# Altium PCB PCB1.PcbDoc
Units mm, origin at the board's own origin, x right, y up, seen from the top; angles counter-clockwise.
Board outline 60.95 x 78.23 mm, 2 copper layers (Top Layer, Bottom Layer); 11 components, 9 nets, 61 pads, 0 vias.
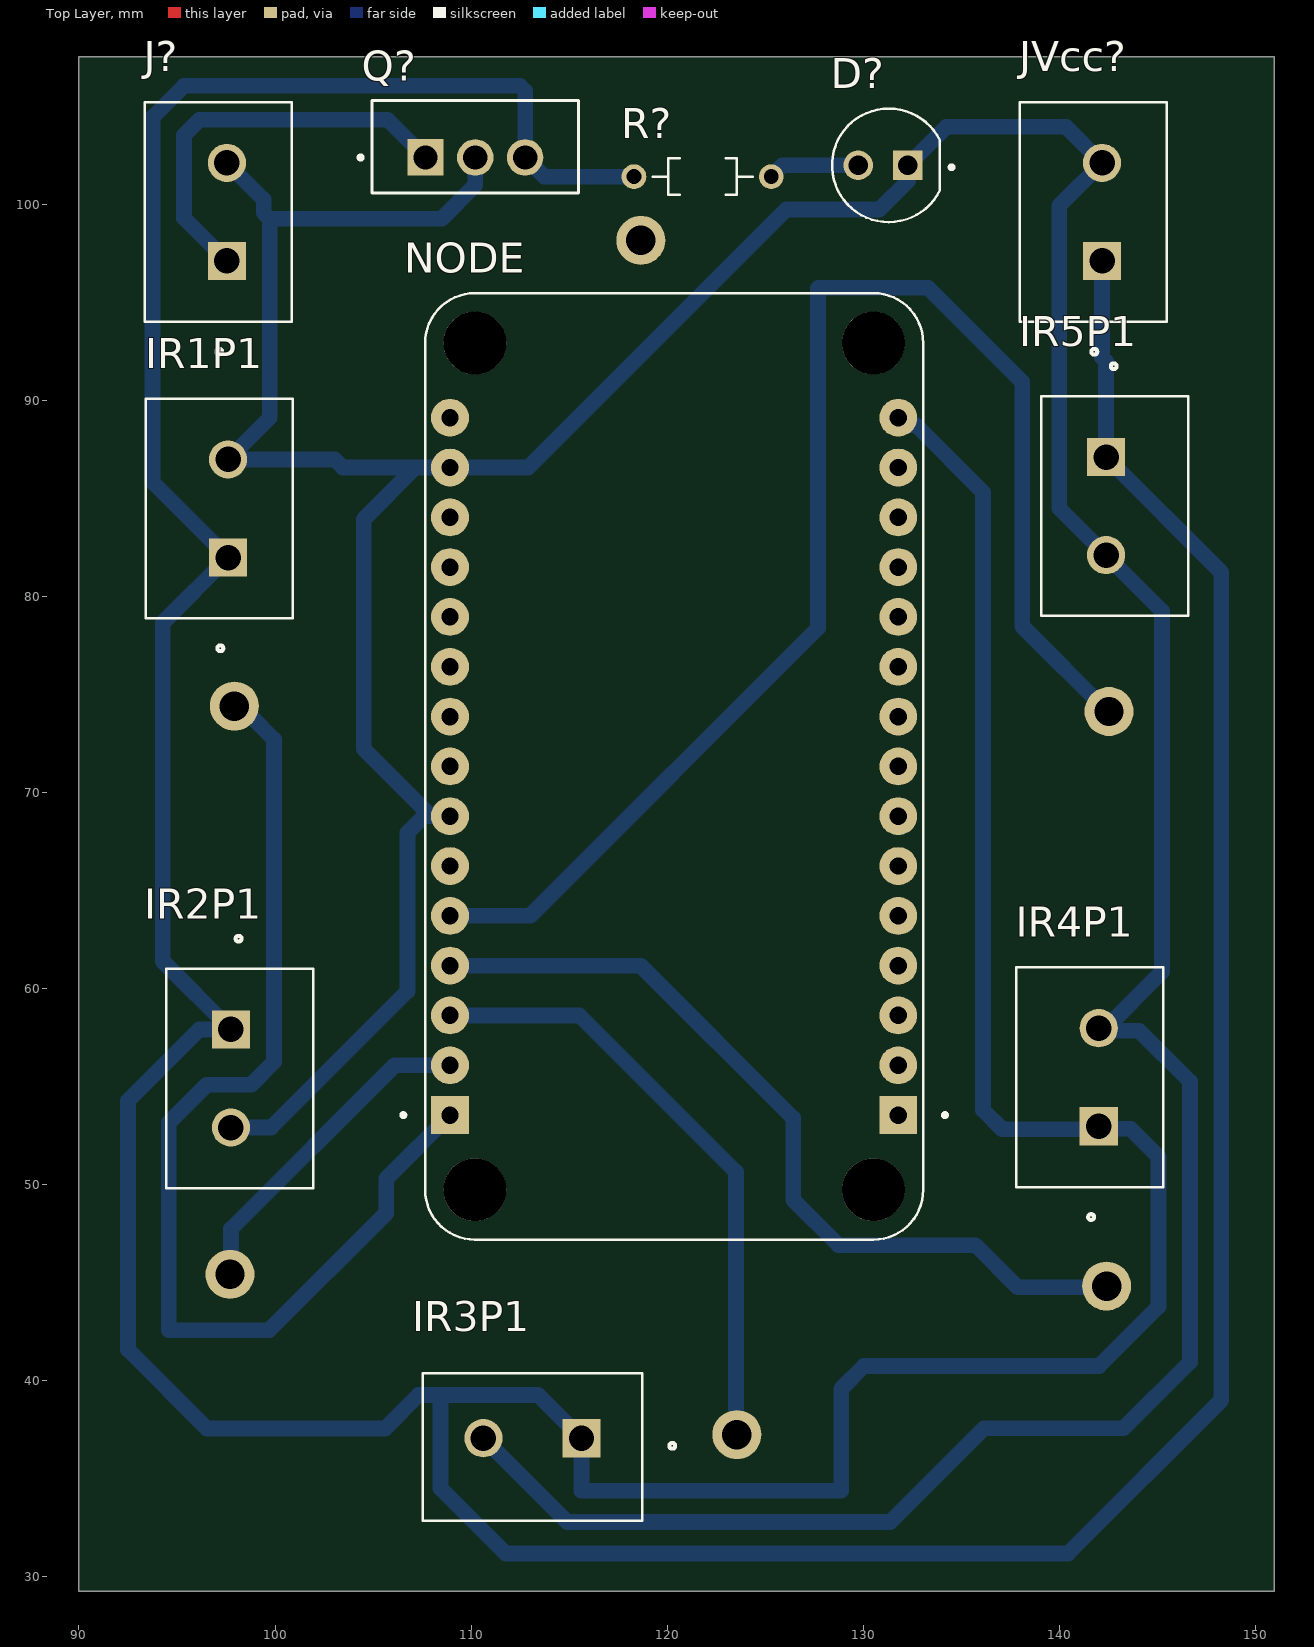
[diagram p0: Top Layer view]
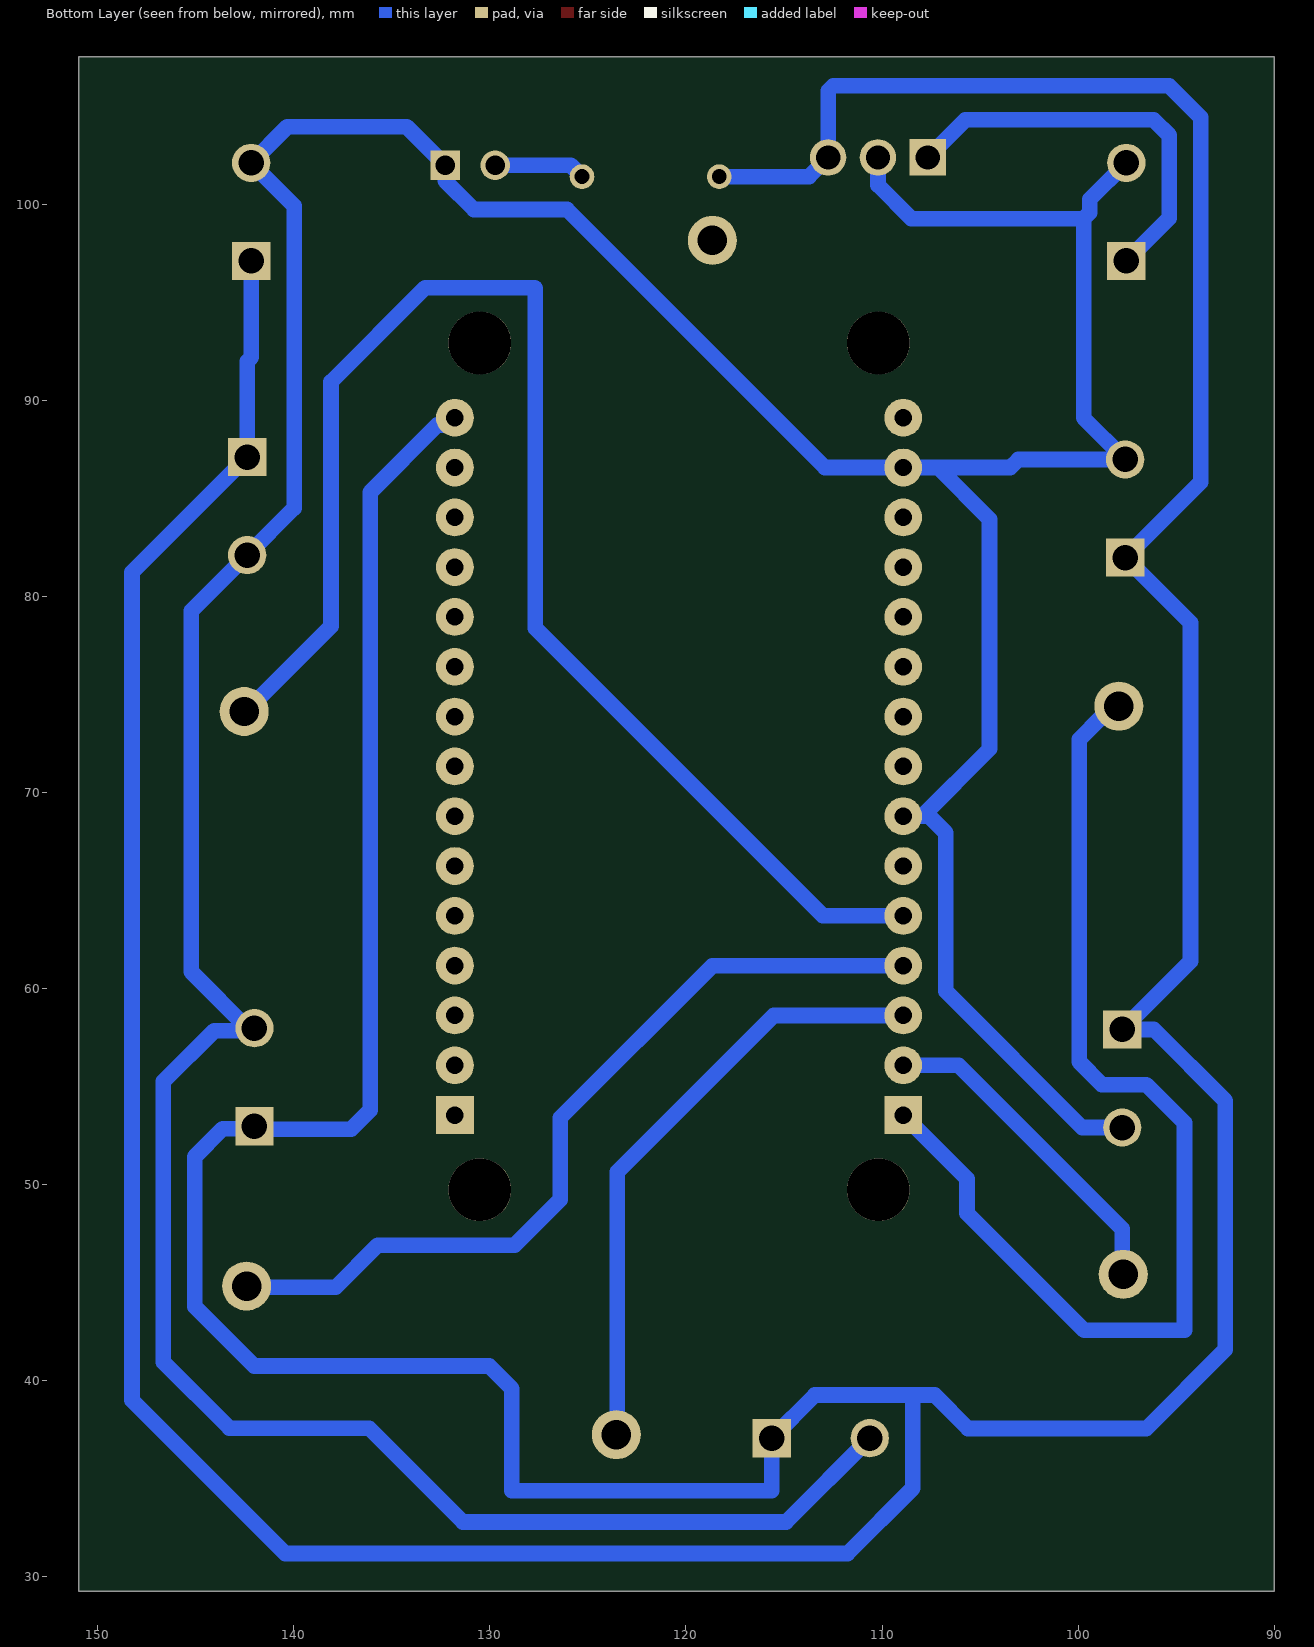
[diagram p1: Bottom Layer view, seen from below]
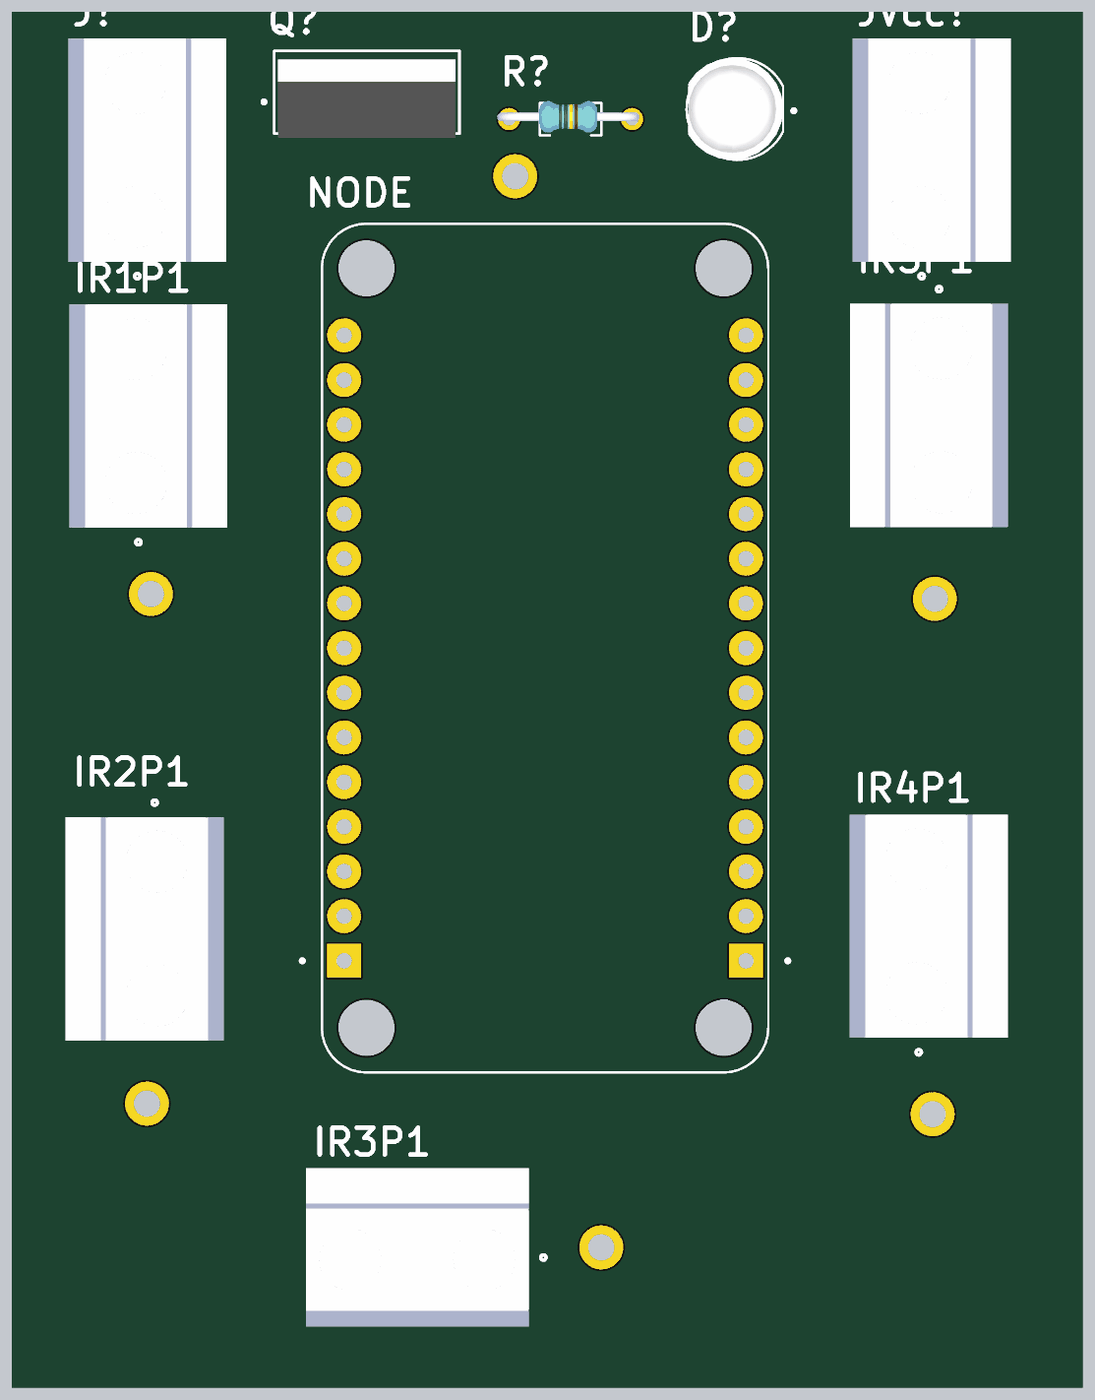
[diagram p2: 3D render of the assembled board from above, using the file's embedded part models]

## Layer stack, top to bottom
Top Solder: solder mask 0.0102, Solder Resist, Dk 3.5
Top Layer: signal copper 0.0356
Dielectric 1: dielectric 0.32, FR-4, Dk 4.8
Bottom Layer: signal copper 0.0356
Bottom Solder: solder mask 0.0102, Solder Resist, Dk 3.5

## Board outline
90,29.275 150.95,29.275 150.95,107.5 90,107.5

## Design rules (kind name [scope] priority, off if disabled: settings)
Clearance [All] p1: gap=0.8 ignorepadtopadclearanceinfootprint=FALSE
PolygonConnect [All] p1: connectstyle=Relief reliefconductorwidth=0.254 reliefentries=4 polygonreliefangle="90 Angle" airgapwidth=0.254
RoutingLayers [All] p1: top layer_v5=FALSE bottom layer_v5=TRUE
RoutingVias [All] p1: holewidth=0.711 width=1.27 viastyle="Through Hole" minholewidth=0.711 minwidth=1.27 maxholewidth=0.711 maxwidth=1.27
SolderMaskExpansion [All] p1: expansion=0.102
Width [All] p1: maxlimit=0.8 minlimit=0.8 preferedwidth=0.8
29 further rules are at their usual default settings.

## Classes and differential pairs
component class Sheet1: D? IR1P1 IR2P1 IR3P1 IR5P1 J? JVcc? NODE Q? R?

## Components (designator, comment, footprint, x,y, rotation, side; value= is the part's Value field where it differs from the comment)
D? "151054RS03000" LED_151054RS03000 131,101.975 r180 top
IR1P1 "" OST_OSTTC020162 97.6,81.975 r90 top
IR2P1 "" OST_OSTTC020162 97.75,57.91 r270 top
IR3P1 "" OST_OSTTC020162 115.625,37.068 r180 top
IR4P1 "" OST_OSTTC020162 142,52.975 r90 top
IR5P1 "" OST_OSTTC020162 142.375,87.1 r270 top
J? "OSTTC020162" OST_OSTTC020162 97.543,97.1 r90 top
JVcc? "OSTTC020162" OST_OSTTC020162 142.168,97.1 r90 top
NODE "113990105" SEEED_113990105 120.35,71.325 r180 top
Q? "LM7805CT/NOPB" TO254P1054X470X2600-3 107.67,102.375 r0 top
R? "1623928-8" RESAD700W45L350D185 121.8,101.4 r0 top

## Footprints (in the part's own frame and the unit in brackets; to place one, negate y for a bottom-side part, rotate by r counter-clockwise, add the part's x,y. Pads: shape width x height; smd on the part's side, far side on the other; paste and mask are expansions set on the pad)
LED_151054RS03000 [mm]
  round 1.508 hole 1: A(1.27,0)
  rect 1.508x1.508 hole 1: C(-1.27,0)
  silkscreen extent -3.6,-2.9 2.6,2.9, body extent -2.9,-2.9 2.51,2.9, height 12.1
OST_OSTTC020162 [mm]
  rect 1.95x1.95 hole 1.3: 1(0,0)
  round 1.95 hole 1.3: 2(5,0)
  silkscreen extent -4.78,-3.3 8.1,4.2, body extent -3.81,-4.68 8.89,4.32, height 16.47
RESAD700W45L350D185 [mm]
  round 1.258 hole 0.75: 1(-3.5,0) 2(3.5,0)
  silkscreen extent -2.55,-0.93 2.55,0.93, body extent -4.19,-0.76 3.93,1.02, height 1.79
SEEED_113990105 [mil]
  rect 75.98x75.98 hole 35: J1_1(-450,700) J2_1(450,700)
  round 75.98 hole 35: J1_2(-450,600) J1_3(-450,500) J1_4(-450,400) J1_5(-450,300) J1_6(-450,200) J1_7(-450,100) J1_8(-450,0) J1_9(-450,-100) J1_10(-450,-200) J1_11(-450,-300) J1_12(-450,-400) J1_13(-450,-500) J1_14(-450,-600) J1_15(-450,-700) J2_2(450,600) J2_3(450,500) J2_4(450,400) J2_5(450,300) J2_6(450,200) J2_7(450,100) J2_8(450,0) J2_9(450,-100) J2_10(450,-200) J2_11(450,-300) J2_12(450,-400) J2_13(450,-500) J2_14(450,-600) J2_15(450,-700)
  round 125.98 hole 125.98 unplated: ""(-400,850) ""(-400,-850) ""(400,850) ""(400,-850)
  silkscreen extent -548,-950 548,950
TO254P1054X470X2600-3 [mm]
  rect 1.86x1.86 hole 1.24: 1(0,0)
  round 1.86 hole 1.24: 2(2.54,0) 3(5.08,0)
  silkscreen extent -3.41,-1.8 7.81,2.9, body extent -2.51,-2.03 7.59,2.41, height 20.73

## Part data
D?: "Red 623nm LED Indication - Discrete 1.9V Radial", Package=None, Availability=Unavailable, MF="{'manufacturer': u'Wurth Elektronik'}", MP=151054RS03000, Price=None
IR1P1 IR2P1 IR3P1 IR4P1 IR5P1: library part OSTTC020162, "CONN, TERMINAL BLOCK, 5mm, 2 PIN, .42\"L x.30\"D x .39\"H", Package=None, Availability=Unavailable, MF="{'manufacturer': u'On Shore'}", MP=OSTTC020162, Price=None
J? JVcc?: "CONN, TERMINAL BLOCK, 5mm, 2 PIN, .42\"L x.30\"D x .39\"H", Package=None, Availability=Unavailable, MF="{'manufacturer': u'On Shore'}", MP=OSTTC020162, Price=None
NODE: "NodeMCU v2 - Lua based ESP8266 development kit", Package=None, Availability=Unavailable, MF="{'manufacturer': u'Seeed Technology'}", MP=113990105, Price=None
Q?: "Standard Regulator Pos 5V 1A 3-Pin(3+Tab) TO-220 Rail", Package=None, Availability=Unavailable, MF="{'manufacturer': u'ON Semiconductor'}", MP=LM7805CT/NOPB, Price=None
R?: "CFR16 5% 10K", Package=None, Availability=Unavailable, MF="{'manufacturer': u'TE Connectivity'}", MP=1623928-8, Price=None

## Free pads (board coordinates)
  round 2.5 hole 1.5: 2(97.7,45.425) 2(97.925,74.4) 2(118.65,98.15) 2(123.55,37.25) 2(142.4,44.825) 2(142.525,74.125)

## Nets (pads, with @x,y where several pads share a name; then routed paths per layer and width w, separated by ;. In a path a pad name is that pad's centre, name@x,y a point inside that pad or via, vN(x,y) a via of type N, cw(c..) or ccw(c..) an arc to the next point about the centre after c; other vN are vias at no path point)
GND: D?.C IR1P1.2 IR2P1.2 IR3P1.2 IR4P1.2 IR5P1.2 J?.2 JVcc?.2 NODE.J2_7 NODE.J2_14 Q?.2 | length 235
  Bottom Layer w0.8: J?.2 99.415,100.228 99.415,99.556 99.72,99.25 ; IR2P1.2 99.798,52.91 106.755,59.867 106.755,67.945 107.595,68.785 107.95,68.785 ; NODE.J2_7 107.95,68.785 ; Q?.2 110.21,100.965 108.495,99.25 99.72,99.25 ; IR3P1.2 114.902,32.791 131.366,32.791 136.158,37.583 143.276,37.583 146.65,40.957 146.65,55.255 144.055,57.85 142.225,57.85 145.225,60.85 145.225,79.25 IR5P1.2 139.979,84.496 139.979,99.911 JVcc?.2 140.331,103.937 134.232,103.937 D?.C 132.27,101.18 130.81,99.72 126.06,99.72 112.905,86.565 NODE.J2_14 107.15,86.565 ; 99.72,99.25 99.72,89.095 IR1P1.2 103.048,86.975 103.458,86.565 107.15,86.565 ; 107.15,86.565 104.518,83.933 104.518,72.217 107.95,68.785
IR1: NODE.J2_1 pad.2@97.925,74.4 | length 56.3
  Bottom Layer w0.8: pad.2@97.75,73.825 98.825,73.825 99.949,72.701 99.949,56.261 98.781,55.093 96.52,55.093 94.575,53.148 94.575,42.57 99.695,42.57 105.667,48.543 105.667,50.292 NODE.J2_1
IR2: NODE.J2_2 pad.2@97.7,45.425 | length 17.6
  Bottom Layer w0.8: pad.2@97.75,44.758 97.75,47.737 106.098,56.085 NODE.J2_2
IR3: NODE.J2_3 pad.2@123.55,37.25 | length 31.3
  Bottom Layer w0.8: NODE.J2_3 115.517,58.625 123.5,50.642 pad.2@123.5,37.275
IR4: NODE.J2_4 pad.2@142.4,44.825 | length 42.7
  Bottom Layer w0.8: NODE.J2_4 118.643,61.165 126.416,53.393 126.416,49.225 128.727,46.914 135.711,46.914 137.867,44.758 pad.2@142.375,44.758
IR5: NODE.J2_5 pad.2@142.525,74.125 | length 73.3
  Bottom Layer w0.8: NODE.J2_5 113.006,63.705 127.686,78.384 127.686,95.707 127.711,95.733 133.299,95.733 138.1,90.932 138.1,78.525 138.1,78.475 pad.2@142.5,74.075
NetD?_A: D?.A R?.2 | length 4.7
  Bottom Layer w0.8: R?.2 125.875,101.975 D?.A
VCC: IR1P1.1 IR2P1.1 IR3P1.1 IR4P1.1 IR5P1.1 JVcc?.1 Q?.3 R?.1 | length 285.8
  Bottom Layer w0.8: R?.1 113.725,101.4 Q?.3 112.75,105.766 112.491,106.025 95.357,106.025 93.751,104.419 93.751,85.824 IR1P1.1 94.275,78.65 94.275,61.385 IR2P1.1 96.137,57.91 92.5,54.273 92.5,41.587 96.52,37.567 105.613,37.567 107.315,39.268 108.433,39.268 ; JVcc?.1 142.168,92.18 142.375,91.973 IR5P1.1 148.25,81.225 148.25,39.005 140.437,31.191 111.76,31.191 108.433,34.519 108.433,39.268 ; IR4P1.1@142.225,52.85 143.625,52.85 145.05,51.425 145.05,43.786 142.014,40.75 130.03,40.75 128.875,39.595 128.875,34.391 115.625,34.391 IR3P1.1 113.425,39.268 108.433,39.268
VCCH: J?.1 Q?.1 | length 20.8
  Bottom Layer w0.8: J?.1 95.352,99.291 95.352,103.505 96.139,104.292 105.753,104.292 Q?.1
pads on no net: NODE. NODE.J1_1 NODE.J1_2 NODE.J1_3 NODE.J1_4 NODE.J1_5 NODE.J1_6 NODE.J1_7 NODE.J1_8 NODE.J1_9 NODE.J1_10 NODE.J1_11 NODE.J1_12 NODE.J1_13 NODE.J1_14 NODE.J1_15 NODE.J2_6 NODE.J2_8 NODE.J2_9 NODE.J2_10 NODE.J2_11 NODE.J2_12 NODE.J2_13 NODE.J2_15
copper on no net: | length 43.9
  Bottom Layer w0.8: 131.78,89.105 132.155,88.73 132.677,88.73 136.1,85.307 136.1,53.8 137.075,52.825 140.05,52.825 142.2,52.825